# Altium PCB T-LOG v1.0.PcbDoc
Units mm, origin at the board's own origin, x right, y up, seen from the top; angles counter-clockwise.
Board outline 11.25 x 14.5 mm, 2 copper layers (TOP, BOTTOM), stack 0.136 mm thick; 18 components, 11 nets, 46 pads, 34 vias.
Unrouted connection lines stored in the file: 1.
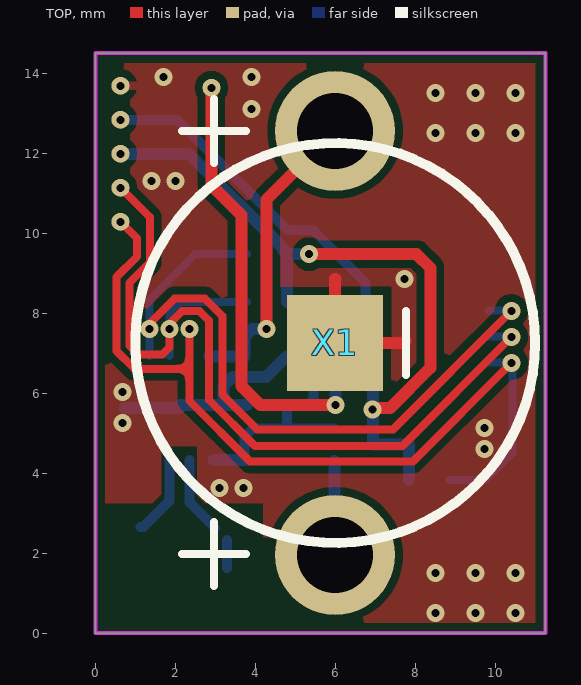
[diagram p0: TOP view]
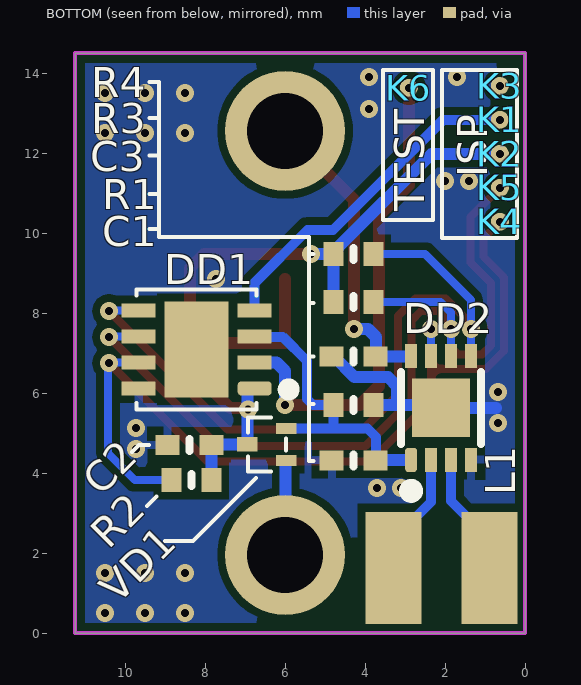
[diagram p1: BOTTOM view, seen from below]
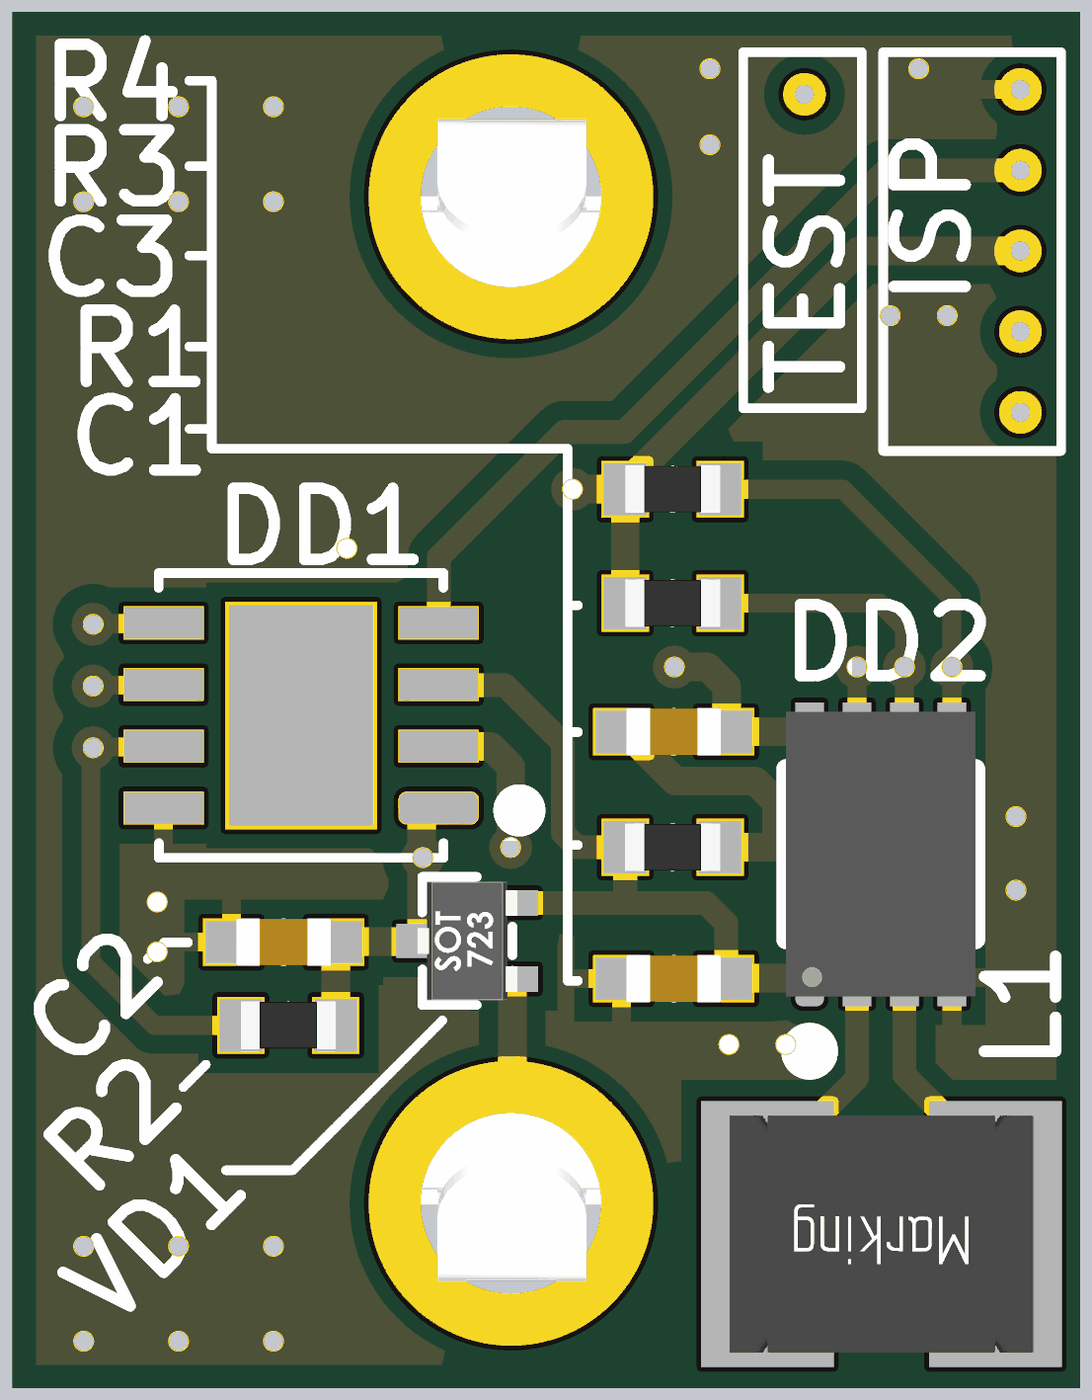
[diagram p2: 3D render of the assembled board from below, using the file's embedded part models]

## Layer stack, top to bottom
TopMask: solder mask 0.01, Solder Resist, Dk 3.5
TOP: signal copper 0.018
Dielectric 1: core 0.1, FR-4, Dk 4.2
BOTTOM: signal copper 0.018
BotMask: solder mask 0.01, Solder Resist, Dk 3.5

## Board outline
0,0 0,14.5 11.25,14.5 11.25,0

## Design rules (kind name [scope] priority, off if disabled: settings)
Clearance ClearancePOLY [InPoly] p1: gap=0.2 ignorepadtopadclearanceinfootprint=FALSE
Clearance ClearanceINNER [OnLayer('INNER1') OR OnLayer('INNER2')] p2: gap=0.15 ignorepadtopadclearanceinfootprint=FALSE
Clearance ClearanceTOPandBOTTOM [OnLayer('TOP') OR OnLayer('BOTTOM')] p3: gap=0.12 ignorepadtopadclearanceinfootprint=FALSE
Clearance POLY-BOARD [InPoly vs OnLayer('Keep-Out Layer')] p4: gap=0.5 ignorepadtopadclearanceinfootprint=FALSE
ComponentClearance [All] p1: gap=0 collisioncheckmode=3 verticalgap=0 showdistances=FALSE
DiffPairsRouting [All] p1: maxlimit=0.25 minlimit=0.1 mostfreqgap=0.125 toplayer_minwidth=0.125 toplayer_maxwidth=0.2 toplayer_prefwidth=0.125 bottomlayer_minwidth=0.125 bottomlayer_maxwidth=0.2 bottomlayer_prefwidth=0.125 maxuncoupledlength=5
HoleSize [All] p1: absolutevalues=TRUE maxlimit=5 minlimit=0.2 maxpercent=80.000 minpercent=20.000
HoleToHoleClearance [All] p1: gap=0.1 allowstackedmicrovias=TRUE
MinimumSolderMaskSliver [All] p1: minsoldermaskwidth=0.1
PlaneClearance [All] p1: clearance=0.5
PlaneConnect [All] p1: planeconnectstyle=Relief reliefexpansion=0.5 reliefentries=4 reliefconductorwidth=0.25 reliefairgap=0.25
PolygonConnect PolygonConnect_PAD_ANT [IsPad AND (InComponent('ANT1') OR InComponent('C14'))] p1: connectstyle=Relief reliefconductorwidth=0.2 reliefentries=4 polygonreliefangle="90 Angle" airgapwidth=0.125
PolygonConnect PolygonConnect_PAD [IsPad] p2: connectstyle=Relief reliefconductorwidth=0.2 reliefentries=4 polygonreliefangle="90 Angle" airgapwidth=0.2
PolygonConnect PolygonConnect_VIA [IsVia] p3: connectstyle=Direct reliefconductorwidth=0.254 reliefentries=4 polygonreliefangle="90 Angle" airgapwidth=0.254
RoutingCorners [All] p1: cornerstyle=45-Degree minsetback=1.25 maxsetback=1.25
RoutingVias [All] p1: holewidth=0.2 width=0.45 viastyle="Through Hole" minholewidth=0.2 minwidth=0.45 maxholewidth=0.2 maxwidth=0.5
SilkToSilkClearance [All] p1: silktosilkclearance=0
SilkToSolderMaskClearance [IsPad] p1: minsilkscreentomaskgap=0 clearancetoexposedcopper=TRUE
SolderMaskExpansion [All] p1: expansion=0.05 istentingtop=FALSE
Width WidthTOPandBOTTOM [OnLayer('TOP') OR OnLayer('BOTTOM')] p1: maxlimit=3 minlimit=0.125 preferedwidth=0.15
Width WidthINNER [OnLayer('INNER1') OR OnLayer('INNER2')] p2: maxlimit=3 minlimit=0.2 preferedwidth=0.3
20 further rules are at their usual default settings.

## Components (designator, comment, footprint, x,y, rotation, side; value= is the part's Value field where it differs from the comment)
C1 "10 нФ" C0402 4.282,4.318 r180 bottom locked
C2 "10 нФ" C0402 8.393,4.703 r0 bottom
C3 "10 нФ" C0402 4.282,6.918 r180 bottom locked
DD1 "PIC16LF15313-I/RF" UDFN_3x3x0.5 6.758,6.115 r0 bottom
DD2 "M24LR64E-RMC6T" UDFN-8_2X3 2.1,5.629 r90 bottom locked
K1 "PIC ISP" THRU_HOLE_02x045 0.629,12.832 r270 bottom locked
K2 "PIC ISP" THRU_HOLE_02x045 0.629,11.982 r270 bottom locked
K3 "PIC ISP" THRU_HOLE_02x045 0.629,13.682 r270 bottom
K4 "PIC ISP" THRU_HOLE_02x045 0.629,10.282 r270 bottom locked
K5 "PIC ISP" THRU_HOLE_02x045 0.629,11.132 r270 bottom locked
K6 "TEST" THRU_HOLE_02x045 2.904,13.632 r270 bottom
L1 "4,7 мкГн" WE-LQ_1210 2.093,1.628 r0 bottom locked
R1 "100К" R0402 4.293,5.702 r0 bottom
R2 "4К7" R0402 8.343,3.827 r0 bottom
R3 "4К7" R0402 4.293,8.273 r180 bottom
R4 "4К7" R0402 4.293,9.472 r180 bottom
VD1 "1SS385FV" SOT-723 5.969,4.315 r90 bottom locked
X1 "KEYSTONE 3031" KEYSTONE_3031 5.996,7.252 r270 top locked

## Footprints (in the part's own frame and the unit in brackets; to place one, negate y for a bottom-side part, rotate by r counter-clockwise, add the part's x,y. Pads: shape width x height; smd on the part's side, far side on the other; paste and mask are expansions set on the pad)
C0402 [mm]
  rect 0.6x0.5 smd paste-0.025 mask+0.05: 1(-0.55,0) 2(0.55,0)
  silkscreen extent 0,-0.15 0,0.15, body extent -0.5,-0.25 0.5,0.25, height 0.63
KEYSTONE_3031 [mm]
  round 3 hole 1.9: 1(-5.3,0) 2(5.3,0)
  rect 2.4x2.4 smd paste-0.01 mask+0.075: 3(0,0)
  silkscreen extent -6.1,-5 6.07,5, body extent -6.12,-4.59 6.12,4, height 3.05
R0402 [mm]
  rect 0.5x0.6 smd paste-0.025 mask+0.05: 1(-0.5,0) 2(0.5,0)
  silkscreen extent 0,-0.15 0,0.15, body extent -0.5,-0.25 0.5,0.25, height 0.3
SOT-723 [mm]
  rect 0.27x0.52 smd paste+0 mask+0.05: 1(0,0) 2(0.8,0)
  rect 0.36x0.52 smd paste+0 mask+0.05: 3(0.4,0.975)
  silkscreen extent -0.28,0.01 1.08,0.96, body extent -0.23,-0.04 1.02,1.01, height 0.5
THRU_HOLE_02x045 [mm] "used for PIC16 ISP in T-LOG project"
  round 0.45 hole 0.2 paste+0 mask+0.05: 1(0,0)
UDFN-8_2X3 [mm]
  rrect50% 0.6x0.3 smd paste+0 mask+0.05: 1(-1.3,0.75)
  rect 0.6x0.3 smd paste+0 mask+0.05: 2(-1.3,0.25) 3(-1.3,-0.25) 4(-1.3,-0.75) 5(1.3,-0.75) 6(1.3,-0.25) 7(1.3,0.25) 8(1.3,0.75)
  rect 1.46x1.46 smd paste-0.04 mask+0.05: 9(0,0)
  silkscreen extent -2.22,-1 0.9,1, body extent -1.5,-1 1.5,1, height 0.53
UDFN_3x3x0.5 [mm]
  rrect50% 0.85x0.35 smd paste-0.01 mask+0.05: 1(0,0)
  rect 0.85x0.35 smd paste-0.01 mask+0.05: 2(0,-0.65) 3(0,-1.3) 4(0,-1.95) 5(2.9,-1.95) 6(2.9,-1.3) 7(2.9,-0.65) 8(2.9,0)
  rect 1.6x2.4 smd paste-0.04 mask+0.05: ePAD(1.45,-0.975)
  silkscreen extent -0.97,-2.48 2.95,0.52, body extent -0.05,-2.48 2.95,0.52, height 0.5
WE-LQ_1210 [mm] "SMT Inductor, body 3.2x2.5mm"
  rect 1.4x2.8 smd paste+0 mask+0.05: 1(-1.2,0) 2(1.2,0)
  body extent -1.6,-1.25 1.6,1.25, height 1.99

## Part data
C1 C2 C3: library part C0402, "Чип-конденсатор 0,01 мкФ 50 В 0402", Type="Чип-конденсатор 0402"
DD1: "Микроконтроллер PIC16LF15313-I/RF"
DD2: "Память EEPROM I2C/NFC 64Кбит M24LR64E-RMC6T UFDFN8 ST"
K1 K2 K3 K4 K5 K6: library part THRU_HOLE_02x045, "used for PIC16 ISP in T-LOG project"
L1: library part WE-LQ_744032004, "Чип-индуктивность WE-LQ 744032004 4,7 мкГн 0,49 А Wurth Elektronik", Type=LQM2HPN2R2MJ0
R1: library part R0402, "Чип-резистор 100 кОм 5% 0402", Type="Чип-резистор 0402"
R2 R3 R4: library part R0402, "Чип-резистор 4,7 кОм 5% 0402", Type="Чип-резистор 0402"
VD1: "Диодная сборка с общим катодом 1SS385FV SOT-723 Toshiba"
X1: library part KEYSTONE_3031, "Держатель элемента CR1025 KEYSTONE 3031"

## Via types
v1: diameter 0.45, hole 0.2, TOP to BOTTOM, tented both sides, 34 vias

## Nets (pads, with @x,y where several pads share a name; then routed paths per layer and width w, separated by ;. In a path a pad name is that pad's centre, name@x,y a point inside that pad or via, vN(x,y) a via of type N, cw(c..) or ccw(c..) an arc to the next point about the centre after c; other vN are vias at no path point)
ANT0: DD2.2 L1.2 | length 2.7
  BOTTOM w0.25: DD2.2 2.35,3.272 L1.2@2.998,2.623 ; L1.2 L1.2@3.293,2.328
ANT1: DD2.3 L1.1 | length 2
  BOTTOM w0.25: L1.1@1.125,2.65 1.2,2.65 1.85,3.3 DD2.3
GND: C1.1 C2.2 C3.1 DD1.8 DD2.4 DD2.9 K3.1 R1.1 X1.3 | length 8.9
  TOP w0.3: 6,8.85 5.996,8.846 X1.3 7.702,7.252 7.75,7.3
  BOTTOM w0.3: 0.725,5.625 0.729,5.629 DD2.9 2.1,5.702 3.15,5.702 ; R1.1 3.15,5.702 ; C3.1 4.782,6.918 4.262,6.398 3.423,6.398 3.2,6.175 3.2,5.752 3.15,5.702
  other v1: 8.5,0.5 9.5,0.5 10.5,0.5 8.5,1.5 9.5,1.5 10.5,1.5 3.1,3.625 3.7,3.625 9.725,4.6 9.725,5.125 0.675,5.25 0.675,6.025 7.725,8.85 1.4,11.3 2,11.3 8.5,12.5 9.5,12.5 10.5,12.5 3.9,13.1 8.5,13.5 9.5,13.5 10.5,13.5 1.7,13.9 3.9,13.9
I2C_SCL: DD1.6 DD2.6 K5.1 R3.2 | length 22.3
  TOP w0.2: K5.1 1.361,10.399 1.361,9.261 0.85,8.75 0.85,7.184 1.072,6.962 1.674,6.962 1.85,7.138 v1(1.85,7.6) 1.898,7.648 1.898,7.777 2.166,8.045 2.605,8.045 2.838,7.812 2.838,5.829 3.991,4.676 7.676,4.676 v1(10.4,7.4)
  BOTTOM w0.2: DD2.6 v1@1.85,7.6 ; v1(1.85,7.6) 1.85,8.01 2.113,8.273 R3.2 ; DD1.6@9.841,7.407 v1@10.4,7.407
I2C_SDA: DD1.5 DD2.5 R4.2 | length 17.9
  TOP w0.2: v1@1.398,7.777 1.986,8.365 2.738,8.365 3.175,7.928 3.175,5.965 4.048,5.092 7.442,5.092 v1(10.4,8.05)
  BOTTOM w0.2: DD2.5 1.35,7.6 1.35,8.325 2.497,9.472 R4.2 ; DD1.5@9.833,8.065 9.841,8.057 v1@10.4,8.057
  other v1: 1.35,7.6
MCLR: DD1.4 K1.1 | length 8.5
  BOTTOM w0.25: K1.1 2.044,12.832 4.801,10.075 5.44,10.075 6.758,8.757 DD1.4
PWR_HARVEST: C1.2 DD1.3 DD2.1 R1.2 VD1.2 | length 7.7
  BOTTOM w0.25: C1.2@3.727,4.323 3.727,4.902 3.94,5.115 4.793,5.115 ; VD1.2 4.793,5.115 ; DD1.3@6.933,7.415 6.925,7.406 6.059,7.406 5.45,6.797 5.45,5.85 5.3,5.7 4.795,5.7 R1.2 4.793,5.115
  BOTTOM w0.3: DD2.1@2.951,4.323 C1.2@3.727,4.323
PWR_MCU: C2.1 DD1.1 K2.1 R2.1 R3.1 R4.1 VD1.3 | length 17.7
  TOP w0.3: v1@5.417,9.472 8.031,9.472 8.375,9.129 8.375,6.628 7.369,5.622 6.954,5.622 v1(6.926,5.593)
  BOTTOM w0.3: K2.1 2.335,11.982 4.693,9.624 4.693,9.572 R4.1 ; R3.1 R4.1 ; v1(5.348,9.472) R4.1 ; DD1.1@6.933,6.115 6.939,6.109 6.939,4.72 VD1.3 6.95,4.709 7.836,4.709 C2.1 R2.1
RF_INT: DD1.7 DD2.7 K4.1 R2.2 | length 22.5
  TOP w0.2: K4.1 1.041,9.869 1.041,9.408 0.533,8.9 0.533,8.885 0.53,8.883 0.53,7.052 0.939,6.642 0.942,6.642 0.981,6.603 2.35,6.603 ; v1(2.35,7.6) 2.35,6.603 ; v1(10.4,6.75) 7.939,4.289 3.87,4.289 2.35,5.809 2.35,6.603
  BOTTOM w0.2: DD2.7 v1@2.35,7.6 ; R2.2 9.757,3.827 10.425,4.496 v1@10.425,6.75 ; DD1.7@9.841,6.757 v1@10.4,6.757
TEST: DD1.2 K6.1 | length 12.2
  TOP w0.3: K6.1 2.904,11.196 3.65,10.45 3.65,6.175 4.125,5.7 v1(6,5.7)
  BOTTOM w0.3: v1(6,5.7) 6,6.55 6.215,6.765 DD1.2 DD1.2@6.933,6.765
VCC_BAT: C3.2 DD2.8 VD1.1 X1.1 X1.2 | length 10
  TOP w0.3: v1(4.275,7.6) 4.275,10.831 X1.1
  BOTTOM w0.3: DD2.8 2.85,6.918 3.727,6.918 3.727,6.916 3.729,6.914 C3.2 3.725,6.925 3.725,7.4 3.925,7.6 v1(4.275,7.6) ; VD1.1@5.983,4.301 5.983,1.966 X1.2
pads on no net: DD1.ePAD

## Polygon pours and split planes (outlines as drawn)
GND on TOP "GND_L01_P000" (solid, remove dead copper, pour order 0): 11.25,14.5 0,14.5 0,0 11.25,0
GND on BOTTOM "GND_L02_P001" (solid, remove dead copper, pour order 1): 11.25,14.5 0,14.5 0,0 11.25,0

## Keep-outs
Keep-Out Layer:
  the board outline again, w0.1

## Other copper
TOP:
  pour cut-out: 2.55,4.675 1.65,4.675 1.65,3.475 1.425,3.25 0,3.25 0,0 4.2,0 4.2,3.25 2.75,3.25 2.55,3.45
BOTTOM:
  pour cut-out: 2.55,4.675 1.65,4.675 1.65,3.475 1.425,3.25 0,3.25 0,0 4.2,0 4.2,3.25 2.75,3.25 2.55,3.45

## Silkscreen, mask and mechanical layers (free items; w line width, h text height)
BotSilk:
  lines w0.1: 5.291,4.295 5.4,4.295 ; 5.291,5.725 5.4,5.725 ; 5.291,6.915 5.4,6.915 ; 5.291,8.25 5.4,8.25 ; 5.291,9.475 5.4,9.475 ; 5.4,4.3 5.4,9.9 9.15,9.9 9.15,13.775 9.388,13.775 ; 6.72,3.878 8.298,2.3 9,2.3 ; 9.15,11.933 9.387,11.933 ; 9.15,10.107 9.384,10.107 ; 9.15,10.975 9.388,10.975 ; 9.15,12.875 9.388,12.875 ; 9.213,3.413 9.45,3.175 ; 9.4,4.7 9.65,4.7 9.825,4.525 ; 9.45,3.175 9.45,3.175 ; 0.2,9.875 0.2,14.075 2.075,14.075 2.075,9.875 0.2,9.875 ; 2.3,10.325 3.55,10.325 3.55,14.075 2.3,14.075 2.3,10.325
  text "ISP" at 0.95,11.4 h0.75 r270